# EAGLE board Copy of count1 (EAGLE 9.7.0)

Size 217.69 x 200.22 mm. Coordinates in mm from the lower left corner, seen from the top.
Outline: 0,0 217.69,0 217.69,200.22 0,200.22 0,0
Copper layers (1*16): Top 0.035mm / dielectric 1.5mm / Bottom 0.035mm
Design rules "default": minimum track width 6mil, minimum drill 0.35mm, track to track 6mil, track to pad 6mil, pad to pad 6mil, via to via 6mil, smd to smd 6mil, copper to edge 40mil, drill to drill 6mil, minimum pad ring 10mil, minimum via ring 8mil, stop-mask expansion 4mil, vias tented up to drill 0mil, thermal gap 10mil

## Footprints (pad centres in the part's own frame; a part is rotated, then mirrored left to right if it is on the bottom)
RESAD1016W63L850D250B = drill 0.83 pad 1.43: 1 -5.08,0; 2 5.08,0
HA-06-SM065 = drill 1 pad 1.676: 1 -2.54,-2.54; 2 0,2.54; 3 2.54,-2.54
SWITCH-MOMENTARY-PTH-6.5MM = drill 1.016 pad 1.88: 1 -3.251,2.261; 2 3.251,2.261; 3 -3.251,-2.261; 4 3.251,-2.261
ARDUINO-UNO-R3-SHIELD = drill 1.016 pad 1.88: 3.3V 24.13,-2.54; 5V 24.13,0; A0 24.13,12.7; A1 24.13,15.24; A2 24.13,17.78; A3 24.13,20.32; A4 24.13,22.86; A5 24.13,25.4; AREF -24.13,-13.97; D2 -24.13,20.32; D3 -24.13,17.78; D4 -24.13,15.24; D5 -24.13,12.7; D6 -24.13,10.16; D7 -24.13,7.62; D8 -24.13,3.81; D9 -24.13,1.27; D10 -24.13,-1.27; D11 -24.13,-3.81; D12 -24.13,-6.35; D13 -24.13,-8.89; GND@0 24.13,2.54; GND@1 24.13,5.08; GND@2 -24.13,-11.43; IOREF 24.13,-7.62; NC 24.13,-10.16; RES 24.13,-5.08; RX -24.13,25.4; SCL -24.13,-19.05; SDA -24.13,-16.51; TX -24.13,22.86; VIN 24.13,7.62
JHD-162A = drill 1.016 long: 1 -19.05,0; 2 -16.51,0; 3 -13.97,0; 4 -11.43,0; 5 -8.89,0; 6 -6.35,0; 7 -3.81,0; 8 -1.27,0; 9 1.27,0; 10 3.81,0; 11 6.35,0; 12 8.89,0; 13 11.43,0; 14 13.97,0; 15 16.51,0; 16 19.05,0

## Placement (x,y rotation side)
R1  220  [RESAD1016W63L850D250B]  178.57,145.09 270 top
R2  1k  [RESAD1016W63L850D250B]  19.42,8.97 90 top
R3  1k  [RESAD1016W63L850D250B]  34.66,8.97 90 top
R4  1k  [RESAD1016W63L850D250B]  49.9,8.97 90 top
R5  1k  [RESAD1016W63L850D250B]  65.14,8.97 90 top
R6  1k  [RESAD1016W63L850D250B]  82.92,8.97 90 top
RPOT1  250k  [HA-06-SM065]  122.69,122.23 0 top
S1  SWITCH_MOMENTARY  [SWITCH-MOMENTARY-PTH-6.5MM]  21.96,25.48 90 top
S2  SWITCH_MOMENTARY  [SWITCH-MOMENTARY-PTH-6.5MM]  37.2,25.48 90 top
S3  SWITCH_MOMENTARY  [SWITCH-MOMENTARY-PTH-6.5MM]  52.44,25.48 90 top
S4  SWITCH_MOMENTARY  [SWITCH-MOMENTARY-PTH-6.5MM]  67.68,25.48 90 top
S5  SWITCH_MOMENTARY  [SWITCH-MOMENTARY-PTH-6.5MM]  85.46,25.48 90 top
U3  ARDUINO-UNO-R3-SHIELD  [ARDUINO-UNO-R3-SHIELD]  47.88,170.37 270 top
U4  LCD-16X2JHD-162A  [JHD-162A]  162.06,97.5 0 top

## Library data of the parts
R1-R6 RPOT1 S1-S5 U3 U4 = Tinkercad

## Nets
U3_5V: R1.1 R2.2 R3.2 R4.2 R5.2 R6.2 RPOT1.1 S1.1 S1.2 S2.1 S2.2 S3.1 S3.2 S4.1 S4.2 S5.1 S5.2 U3.5V U4.2
U3_A1: S1.3 S1.4 U3.A1
U3_A2: S2.3 S2.4 U3.A2
U3_A3: S3.3 S3.4 U3.A3
U3_A4: S4.3 S4.4 U3.A4
U3_A5: S5.3 S5.4 U3.A5
U3_D2: U3.D2 U4.14
U3_D3: U3.D3 U4.13
U3_D4: U3.D4 U4.12
U3_D5: U3.D5 U4.11
U3_D11: U3.D11 U4.6
U3_D12: U3.D12 U4.4
U3_GND: R2.1 R3.1 R4.1 R5.1 R6.1 RPOT1.3 U3.GND@0 U3.GND@1 U3.GND@2 U4.1 U4.5 U4.16
U4_LED+: R1.2 U4.15
U4_VO: RPOT1.2 U4.3

## Tracks (layer width: path | path; a pad name or v marks a point on that pad's centre or on a via)
U3_5V  (18 unrouted)
U3_A1  (2 unrouted)
U3_A2  (2 unrouted)
U3_A3  (2 unrouted)
U3_A4  (2 unrouted)
U3_A5  (2 unrouted)
U3_D2  (1 unrouted)
U3_D3  (1 unrouted)
U3_D4  (1 unrouted)
U3_D5  (1 unrouted)
U3_D11  (1 unrouted)
U3_D12  (1 unrouted)
U3_GND  (11 unrouted)
U4_LED+  (1 unrouted)
U4_VO  (1 unrouted)